# Altium PCB PLL.PcbDoc
Units mil, origin at the board's own origin, x right, y up, seen from the top; angles counter-clockwise.
Board outline 695.03 x 905.03 mil, 2 copper layers (Top Layer, Bottom Layer); 12 components, 7 nets, 40 pads, 0 vias.
Unrouted connection lines stored in the file: 2.
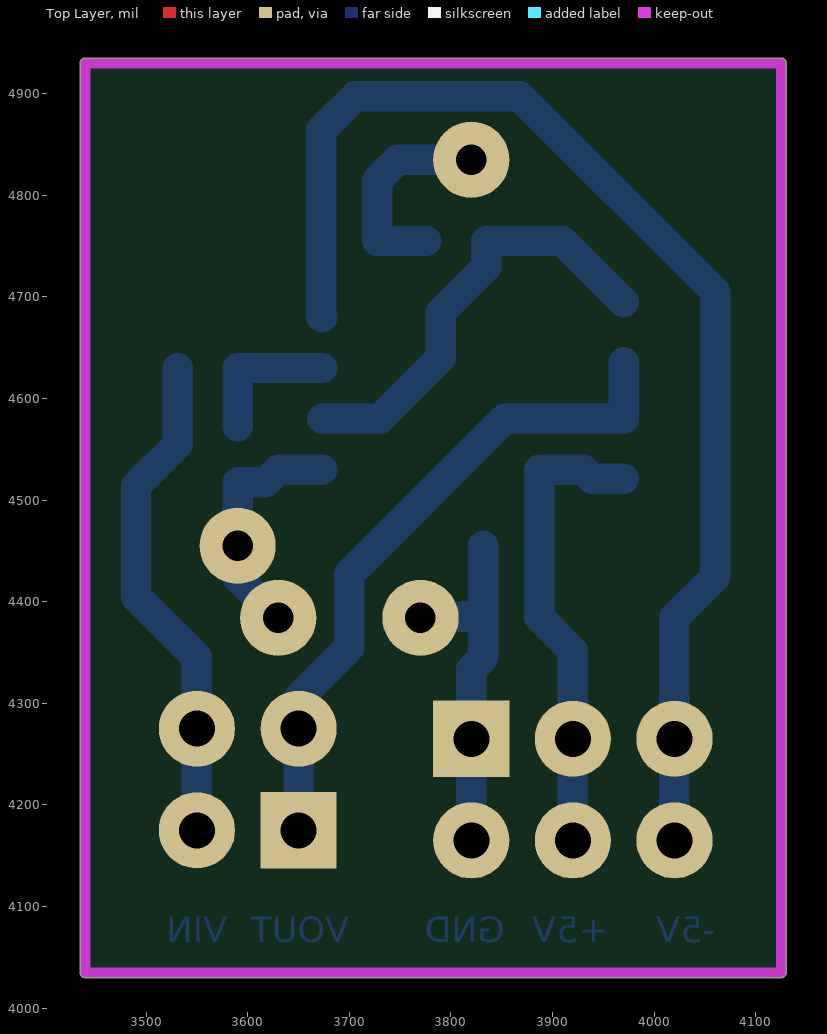
[diagram p0: Top Layer view]
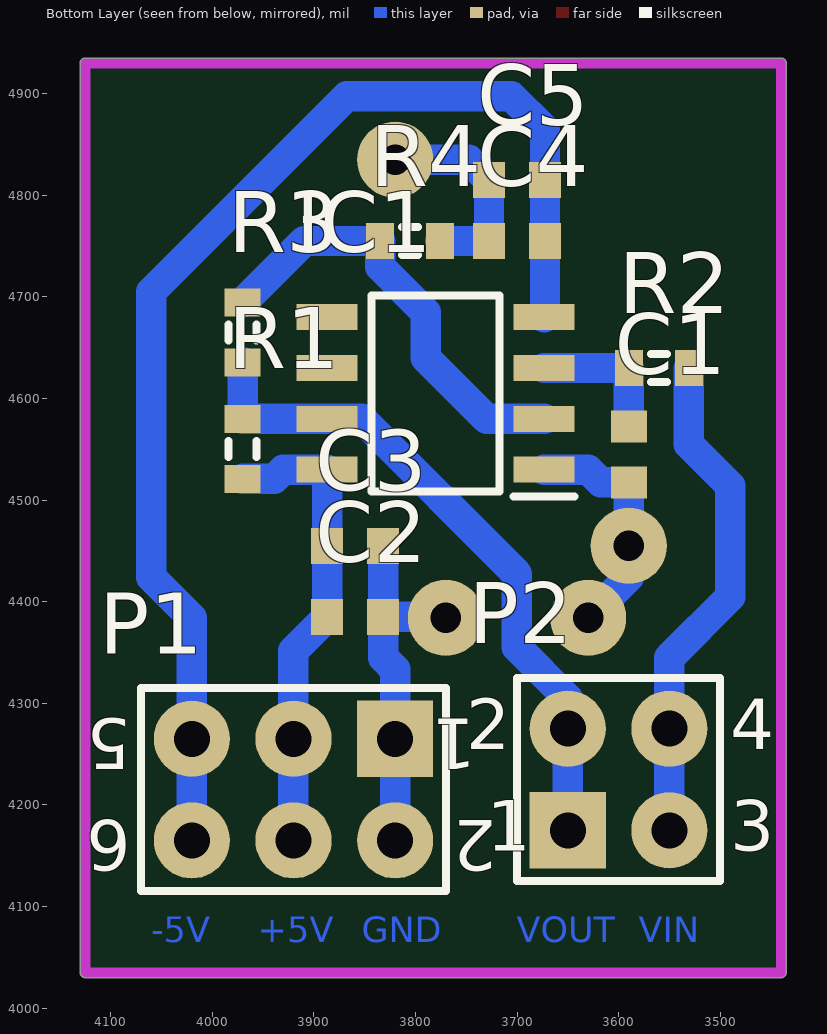
[diagram p1: Bottom Layer view, seen from below]

## Layer stack, top to bottom
Top Solder: solder mask 0.4, Solder Resist, Dk 3.5
Top Layer: signal copper 1.4
Dielectric 1: dielectric 12.6, FR-4, Dk 4.8
Bottom Layer: signal copper 1.4
Bottom Solder: solder mask 0.4, Solder Resist, Dk 3.5

## Board outline
4125,4029.99 ccw(c4125,4035) 4130.02,4035 4130.02,4930 ccw(c4125,4930) 4125,4935.02 3440,4935.02 ccw(c3440,4930) 3434.99,4930 3434.99,4035 ccw(c3440,4035) 3440,4029.99

## Design rules (kind name [scope] priority, off if disabled: settings)
Clearance [All] p1: gap=10 ignorepadtopadclearanceinfootprint=FALSE except(0: Arc-Hole Track-Hole SMDPad-Hole THPad-Hole Via-Hole Fill-Hole Poly-Hole Region-Hole Text-Hole)
PolygonConnect [All] p1: connectstyle=Relief reliefconductorwidth=10 reliefentries=4 polygonreliefangle="90 Angle" airgapwidth=10
RoomDefinition PLL [InComponentClass('PLL')] p1: confinementstyle=ConfineIn formatcopy=TRUE lockcomponents=FALSE outline 4125,4035 3440,4035 3440,4930 4125,4930
RoutingVias [All] p1: holewidth=28 width=50 viastyle="Through Hole" minholewidth=28 minwidth=50 maxholewidth=28 maxwidth=50
SolderMaskExpansion [All] p1: expansion=4
Width [All] p1: maxlimit=50 minlimit=10 preferedwidth=30 bottomlayer_maxwidth=10 bottomlayer_prefwidth=10 minimp=50.000000 maximp=50.000000 favimp=50.000000
30 further rules are at their usual default settings.

## Components (designator, comment, footprint, x,y, rotation, side; value= is the part's Value field where it differs from the comment)
C1 "Cap" 1608[0603] 3590,4545 r90 bottom value=4.7nF
C2 "Cap" 1608[0603] 3859.21,4385 r0 bottom value=10uF
C3 "Cap" 1608[0603] 3859.21,4455 r0 bottom value=0.1uF
C4 "Cap" 1608[0603] 3700,4755 r180 bottom value=10uF
C5 "Cap" 1608[0603] 3700,4815 r180 bottom value=0.1uF
IC1 "LM311D" SOIC127P600X175-8N 3780,4605 r0 bottom
P1 "Header 3X2" HDR2X3 3820,4265 r0 bottom
P2 "Header 2X2" HDR2X2 3650,4175 r180 bottom
R1 "Res1" J1-0603 3970,4550.47 r270 bottom value=5K
R2 "Res1" J1-0603 3560.47,4630 r180 bottom value=10K
R3 "Res1" J1-0603 3970,4665 r270 bottom value=9.5K
R4 "Res1" J1-0603 3805.12,4755 r0 bottom value=22

## Footprints (in the part's own frame and the unit in brackets; to place one, negate y for a bottom-side part, rotate by r counter-clockwise, add the part's x,y. Pads: shape width x height; smd on the part's side, far side on the other; paste and mask are expansions set on the pad)
1608[0603] [mm] "Chip Capacitor, Body 1.6x0.8mm, IPC High Density"
  rect 0.8x0.9 smd: 1(-0.7,0) 2(0.7,0)
  body extent -0.87,-0.48 0.87,0.48, height 1.3
HDR2X2 [mm] "Connector; Header; 2x2 Position"
  rect 1.905x1.905 hole 0.9: 1(0,0)
  round 1.905 hole 0.9: 2(0,2.54) 3(2.54,0) 4(2.54,2.54)
  silkscreen extent -1.27,-1.27 3.81,3.81
HDR2X3 [mm] "Connector; Header; 3x2 Position"
  rect 1.905x1.905 hole 0.9: 1(0,0)
  round 1.905 hole 0.9: 2(0,2.54) 3(2.54,0) 4(2.54,2.54) 5(5.08,0) 6(5.08,2.54)
  silkscreen extent -1.27,-1.27 6.35,3.81
J1-0603 [mm] "Chip Resistor, Body 1.6x0.8mm, IPC High Density"
  rect 0.7x0.9 smd: 1(-0.75,0) 2(0.75,0)
  silkscreen extent -0.2,-0.35 0.2,0.35, body extent -0.85,-0.48 0.85,0.48, height 0.9
SOIC127P600X175-8N [mm]
  rect 1.525x0.65 smd: 1(-2.712,1.905) 2(-2.712,0.635) 3(-2.712,-0.635) 4(-2.712,-1.905) 5(2.712,-1.905) 6(2.712,-0.635) 7(2.712,0.635) 8(2.712,1.905)
  silkscreen extent -3.47,-2.45 1.6,2.58, body extent -3,-2.45 3,2.45, height 1.75

## Part data
C1 C2 C3 C4 C5: "Capacitor", LatestRevisionDate=17-Jul-2002, LatestRevisionNote="Re-released for DXP Platform.", PackageDescription="Radial Cap, Thru-Hole; 2 Leads; 0.3 in Pin Spacing", PackageReference=RAD-0.3, Published=8-Jun-2000, Publisher="Altium Limited"
IC1: "Integrated Circuit", Manufacturer_Name=STMicroelectronics, Mouser Part Number=511-LM311D, RS Part Number=1686808, Allied_Number=70013578, Allied Price/Stock=http://www.alliedelec.com/stmicroelectronics-lm311d/70013578/, Datasheet Link=http://www.st.com/st-web-ui/static/active/en/resource/technical/document/datasheet/CD00001072.pdf, Height=1.75mm, Manufacturer_Part_Number=LM311D, Mouser Price/Stock=https://www.mouser.com/Search/Refine.aspx?Keyword=511-LM311D, RS Price/Stock=http://uk.rs-online.com/web/p/products/1686808
P1: "Header, 3-Pin, Dual row", LatestRevisionDate=17-Jul-2002, LatestRevisionNote="Re-released for DXP Platform.", Publisher="Altium Limited"
P2: "Header, 2-Pin, Dual row", LatestRevisionDate=17-Jul-2002, LatestRevisionNote="Re-released for DXP Platform.", Publisher="Altium Limited"
R1 R2 R3 R4: "Resistor", LatestRevisionDate=17-Jul-2002, LatestRevisionNote="Re-released for DXP Platform.", PackageDescription="Axial Device, Thru-Hole; 2 Leads; 0.3 in Pin Spacing", PackageReference=AXIAL-0.3, Published=8-Jun-2000, Publisher="Altium Limited"

## Free pads (board coordinates)
  round 75 hole 30: 2(3590,4455) 2(3630,4384.06) 3(3770,4384.06) 4(3820,4835)

## Nets (pads, with @x,y where several pads share a name; then routed paths per layer and width w, separated by ;. In a path a pad name is that pad's centre, name@x,y a point inside that pad or via, vN(x,y) a via of type N, cw(c..) or ccw(c..) an arc to the next point about the centre after c; other vN are vias at no path point)
+5V: C2.2 C3.2 IC1.8 P1.3 P1.4 R1.2 | length 465.7
  Bottom Layer w30: P1.4 P1.3 3920,4351.77 C2.2 C3.2 IC1.8 3930,4530 3939.06,4520.94 R1.2
-5V: C4.2 C5.2 IC1.4 P1.5 P1.6 | length 1222.2
  Bottom Layer w30: IC1.4 3672.44,4680.79 C4.2 C5.2 3672.44,4864.21 3705.73,4897.5 3867.5,4897.5 4060,4705 4060,4424.06 4020,4384.06 P1.5 P1.6
GND: C1.1 C2.1 C3.1 C4.1 C5.1 IC1.1 P1.1 P1.2 pad.2 pad.3 pad.4 R4.1 | length 813.1
  Bottom Layer w30: pad.2@3630,4384.06 3590,4424.06 3590,4455 C1.1 3617.44,4517.44 3630,4530 IC1.1 ; pad.3@3760.94,4385 pad.3 3770.94,4385 C2.1 ; R4.1 C4.1 C5.1 3747.56,4835 pad.4 ; P1.2 P1.1 3820,4333.35 3831.65,4345 C2.1 ; C3.1 C2.1
NetC1_2: C1.2 IC1.3 R2.1 | length 140.7
  Bottom Layer w30: C1.2 R2.1 IC1.3
NetIC1_2: IC1.2 R3.1 R4.2 | length 436
  Bottom Layer w30: IC1.2 3730,4580 3790,4640 3790,4685 3834.65,4729.65 R4.2 3909.53,4755 R3.1 R3.1@3970,4695
VIN: P2.3 P2.4 R2.2 | length 496.8
  Bottom Layer w30: R2.2 3530.94,4555 3490,4514.06 3490,4405 3550,4345 P2.4 P2.3
VOUT: IC1.7 P2.1 P2.2 R1.1 R3.2 | length 661.7
  Bottom Layer w30: P2.1 P2.2 3650,4305 3700.03,4355.03 3700.03,4427.25 3852.78,4580 IC1.7 R1.1 R3.2
pads on no net: IC1.5 IC1.6

## Keep-outs
Keep-Out Layer:
  lines w10: 3440,4035 3440,4930 4125,4930 4125,4035 3440,4035

## Other copper
Bottom Layer:
  text "VIN" at 3580,4065 h25
  text "VOUT" at 3700.03,4065 h25
  text "GND" at 3852.78,4065 h25
  text "+5V" at 3955,4065 h25
  text "-5V" at 4060,4065 h25

## Text inside footprints (layer, text, board x,y; h text height)
P1: Bottom Overlay "6" at 4080,4185 h50 r180; Bottom Overlay "5" at 4080,4285 h50 r180; Bottom Overlay "2" at 3720,4185 h50 r180; Bottom Overlay "1" at 3740,4285 h50 r180
P2: Bottom Overlay "1" at 3730,4155 h50; Bottom Overlay "2" at 3750,4255 h50; Bottom Overlay "4" at 3490,4255 h50; Bottom Overlay "3" at 3490,4155 h50